# EAGLE board LoRa Node Board (EAGLE 8.6.0)
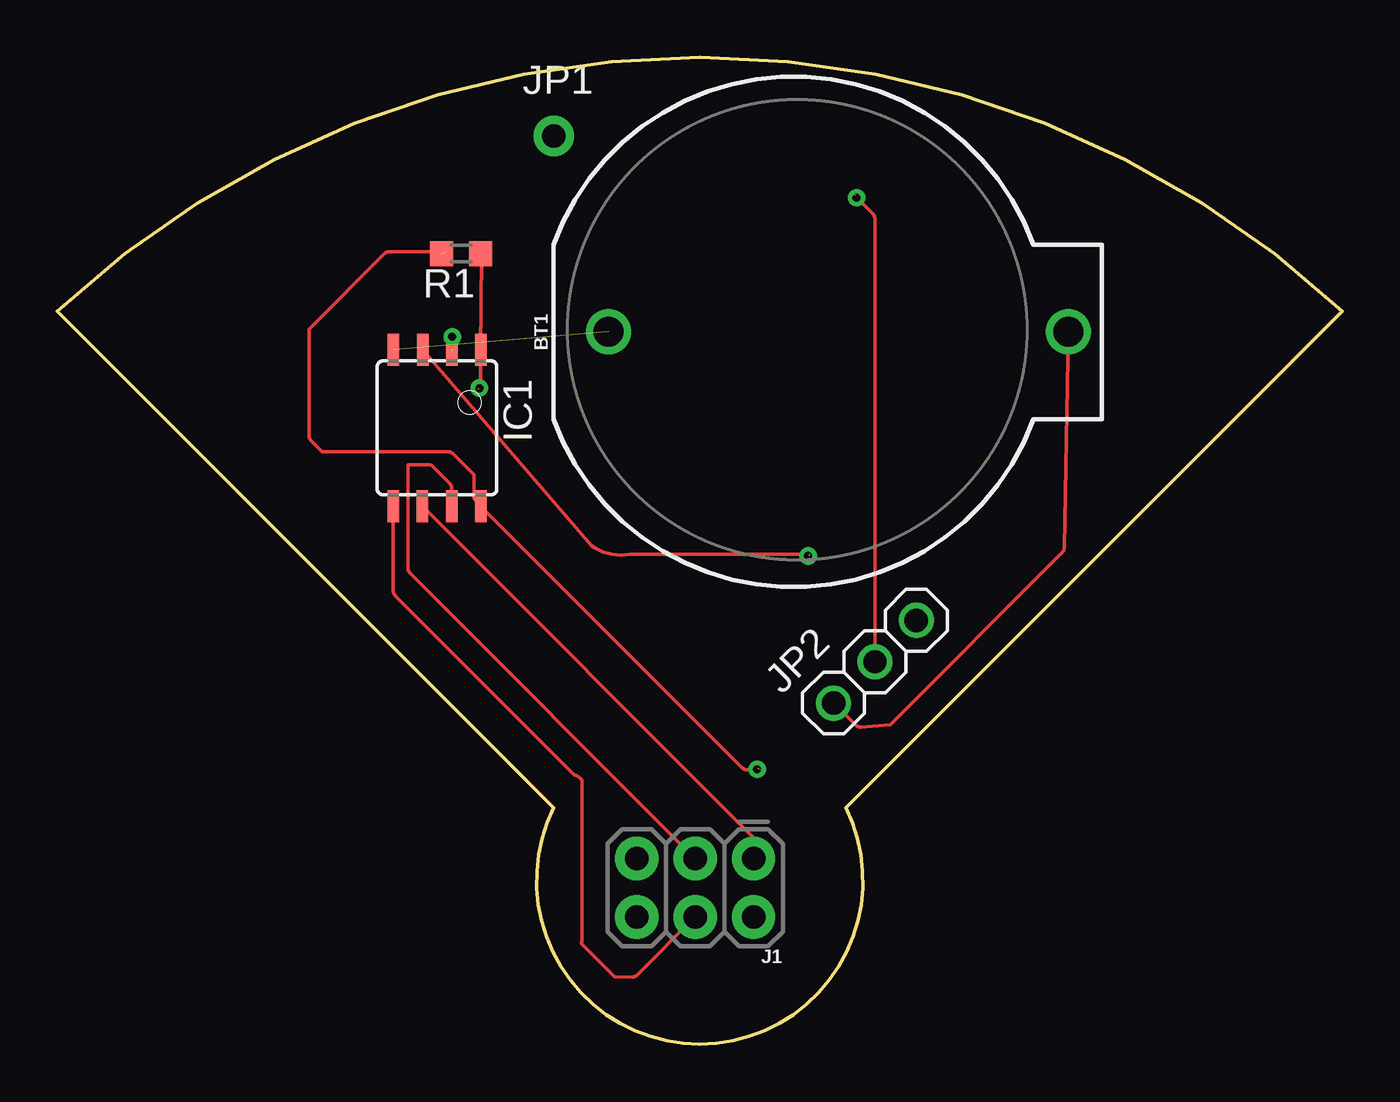
[diagram p0: board, top side]
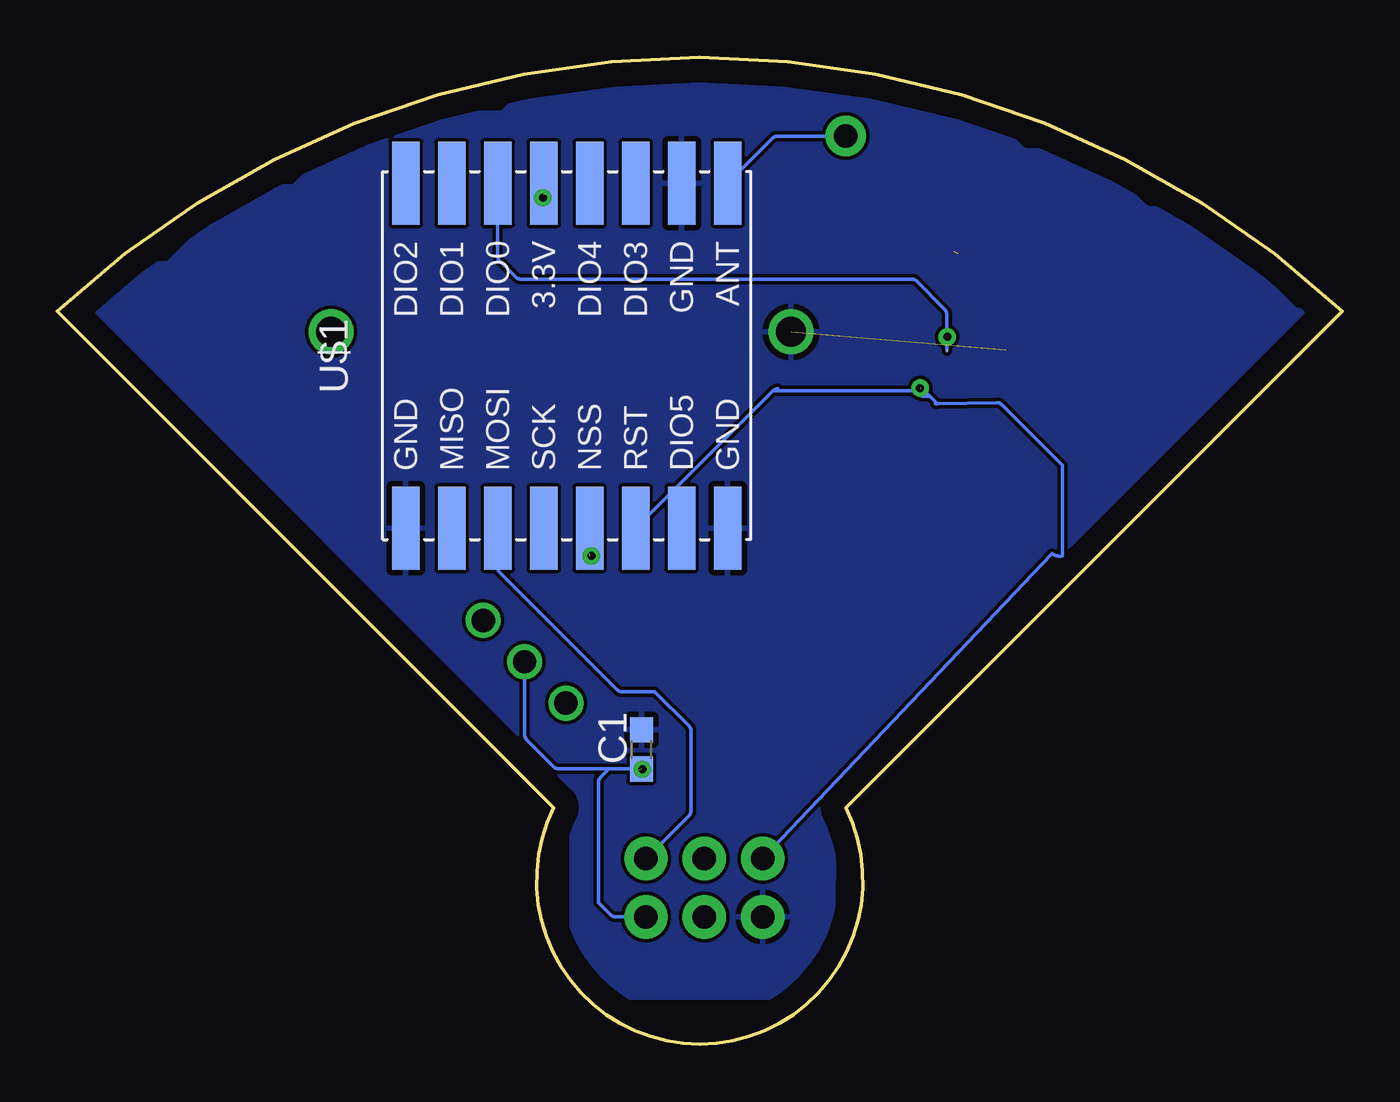
[diagram p1: board, bottom side, seen from below]

Size 55.88 x 42.9 mm. Coordinates in mm from the lower left corner, seen from the top.
Outline: 21.59,10.27 arc233 34.29,10.27 55.88,31.86 arc86 0,31.86 21.59,10.27
Copper layers (1*16): Top 0.035mm / dielectric 1.5mm / Bottom 0.035mm
Design rules "default *": minimum track width 6mil, minimum drill 0.35mm, track to track 6mil, track to pad 8mil, pad to pad 6mil, via to via 6mil, smd to smd 6mil, copper to edge 40mil, drill to drill 6mil, minimum pad ring 10mil, minimum via ring 8mil, stop-mask expansion 4mil, vias tented up to drill 0mil, thermal gap 10mil

## Footprints (pad centres in the part's own frame; a part is rotated, then mirrored left to right if it is on the bottom)
BATTCOM_20MM_PTH = drill 1.3: 1 11.85,0; 2 -8.15,0
C0603 = smd 1.1 x 1: 1 -0.85,0; 2 0.85,0
8S2 = smd 0.5 x 1.4: 1 -1.905,-3.404; 2 -0.645,-3.404; 3 0.625,-3.404; 4 1.895,-3.404; 5 1.905,3.404; 6 0.635,3.404; 7 -0.635,3.404; 8 -1.905,3.404
2X3-NS = drill 1.016 pad 1.88: 1 -2.54,-1.27; 2 -2.54,1.27; 3 0,-1.27; 4 0,1.27; 5 2.54,-1.27; 6 2.54,1.27
1X01-CLEANBIG = drill 1.016 pad 1.778: 1 0,0
1X03 = drill 1.016: 1 -2.54,0; 2 0,0; 3 2.54,0
R0603 = smd 1 x 1.1: 1 -0.85,0; 2 0.85,0
WIRELESS-LORA-RFM95W#SMD = smd 3.6 x 1.2: A1 -7.5,7; A2 -7.5,5; A3 -7.5,3; A4 -7.5,1; A5 -7.5,-1; A6 -7.5,-3; A7 -7.5,-5; A8 -7.5,-7; B1 7.5,7; B2 7.5,5; B3 7.5,3; B4 7.5,1; B5 7.5,-1; B6 7.5,-3; B7 7.5,-5; B8 7.5,-7

## Placement (x,y rotation side)
BT1  [BATTCOM_20MM_PTH]  32.12,30.97 0 top
C1  [C0603]  30.48,12.81 90 bottom
IC1  TINY13-20SU  [8S2]  16.51,26.78 180 top
J1  AVR_SPI_PROG_3X2NS  [2X3-NS]  27.74,6.8 180 top
JP1  [1X01-CLEANBIG]  21.59,39.48 0 top
JP2  [1X03]  35.56,16.62 45 top
R1  [R0603]  17.56,34.37 180 top
U$1  WIRELESS-LORA-RFM95W#SMD  [WIRELESS-LORA-RFM95W#SMD]  33.73,29.93 90 bottom

## Library data of the parts
BT1 = SparkFun-Batteries; PROD_ID: BATT-09031; SF_SKU: PRT-00783
C1 = rcl; SPICEPREFIX: C
IC1 = atmel; MPN: ATTINY13-20SU; OC_FARNELL: 9171568; OC_NEWARK: 96K6522
J1 = SparkFun-Connectors
JP1 JP2 = adafruit
R1 = rcl; SPICEPREFIX: R
U$1 = diy-modules

## Nets
ANT: JP1.1 U$1.B8
B1: U$1.B1
DIO1: U$1.B2
DIO3: U$1.B6
DIO4: U$1.B5
DIO5: U$1.A7
GND: BT1.2 C1.2 IC1.4 J1.6 U$1.A1 U$1.A8 U$1.B7
MISO: U$1.A2
N$20: BT1.1 JP2.1
PB0: IC1.5 J1.4
PB1: IC1.6 J1.1 U$1.A3
PB2: IC1.7 J1.3
PB3: IC1.2 U$1.B3
PB4: IC1.3 U$1.A5
RST: IC1.1 J1.5 R1.1 U$1.A6
SCK: U$1.A4
VCC: C1.1 IC1.8 J1.2 JP2.2 R1.2 U$1.B4

## Tracks (layer width: path | path; a pad name or v marks a point on that pad's centre or on a via)
ANT
  Bottom 0.152: U$1.B8 24.77,39.39 arc45 24.54,39.48 JP1.1
GND  (1 unrouted)
  pour Bottom: 22.1,4.27 arc45 22.19,4.05 24.16,2.07 arc45 24.39,1.98 31.67,1.98 33.55,3.86 33.55,10.1 arc-45 33.62,10.28 54.18,30.84 arc45 54.27,31.06 54.27,32.49 52.87,33.89 arc45 52.65,33.98 51.09,33.98 48.65,36.42 arc-45 48.55,36.65 48.55,36.77 48.1,37.22 arc45 47.88,37.31 45.62,37.31 43.85,39.09 arc-45 43.75,39.31 43.75,39.38 42.15,39.38 arc-45 41.92,39.47 41.1,40.29 arc-45 41.07,40.37 41.01,40.43 arc45 40.79,40.52 36.57,40.52 35.29,41.8 arc45 35.07,41.89 33.16,41.89 32.93,42.12 arc45 32.71,42.21 22.72,42.21 arc45 22.5,42.12 22.07,41.69 19.37,41.69 arc45 19.14,41.6 18.17,40.62 15.69,40.62 arc45 15.46,40.53 13.91,38.97 arc-45 13.68,38.88 10.98,38.88 8.56,36.46 arc-45 8.34,36.37 6.43,36.37 2.09,32.03 arc-45 1.87,31.94 0.86,31.94 21.99,10.81 arc-45 22.09,10.58 22.09,9.84
N$1  (via drill 0.35 pad 0.55)
  other vias: 18.35,28.53
N$2  (via drill 0.35 pad 0.55)
  other vias: 17.17,30.75
N$3  (via drill 0.35)
  other vias: 34.76,36.8
N$4  (via drill 0.35)
  other vias: 30.44,11.95
N$5  (via drill 0.35)
  other vias: 32.65,21.22
N$20
  Top 0.152: JP2.1 34.72,13.88 arc45 34.94,13.78 36.22,13.89 43.61,21.27 arc45 43.81,21.6 BT1.1
PB0
  Top 0.152: IC1.5 14.6,19.71 arc45 14.7,19.49 22.47,11.71 arc-45 22.83,11.44 22.83,4.52 arc45 22.8,4.36 24.22,2.93 25,2.91 arc45 25.22,3.01 J1.4
PB1
  Top 0.152: IC1.6 30.19,9.07 arc-45 30.28,8.84 J1.1
  Bottom 0.152: U$1.A3 36.73,20.73 arc-45 36.63,20.5 31.54,15.41 arc-45 31.32,15.32 29.9,15.32 28.41,13.83 arc45 28.32,13.61 28.32,10.16 arc45 28.41,9.94 J1.1
PB2
  Top 0.152: J1.3 15.34,20.46 arc-45 15.25,20.69 15.25,25.2 16.11,25.2 arc-45 16.33,25.11 17.05,24.39 arc-45 17.14,24.16 IC1.7
PB3  (1 unrouted)
  Bottom 0.152: U$1.B3 36.73,34.26 arc-45 36.63,34.04 35.96,33.36 arc-45 35.73,33.27 18.73,33.27 arc45 18.5,33.17 17.29,31.96 arc45 17.2,31.74 17.2,30.16
PB4  (1 unrouted)
  Top 0.152: IC1.3 23.24,21.67 arc45 24.91,21.29 32.57,21.29 arc-45 32.71,21.23
  Bottom 0.152: U$1.A5 32.73,21.32 arc-45 32.66,21.16
RST  (1 unrouted)
  Top 0.152: 18.45,34.22 IC1.1 18.41,28.76 arc-45 18.32,28.53 18.33,28.51 arc45 18.35,28.5 | 18.45,34.22 arc-45 18.51,34.25 18.62,34.36 | 18.45,34.22 18.41,34.35 arc45 R1.1
  Bottom 0.152: J1.5 12.62,21.32 arc-45 12.17,21.23 12.17,25.18 14.79,27.79 arc-45 15.01,27.89 17.6,27.84 | 17.6,27.84 17.68,27.84 | U$1.A6 24.75,28.4 | 24.75,28.4 arc45 24.53,28.5 | 17.6,27.84 17.93,28.17 | 17.93,28.17 18.29,28.53 | 18.29,28.53 18.34,28.58 arc-45 18.36,28.59 | 24.75,28.4 18.55,28.4 | 18.55,28.4 arc-45 18.32,28.5 18.29,28.53 | 17.93,28.17 18.18,28.17 arc45 18.41,28.26 18.55,28.4
VCC  (3 unrouted)
  Top 0.152: JP2.2 35.56,35.88 arc45 35.47,36.1 34.63,36.94 | 30.58,11.93 30,11.93 arc-45 29.78,12.02 IC1.8 18.22,23.57 arc-45 18.13,23.8 18.13,24.75 17.22,25.66 arc45 16.99,25.75 11.51,25.75 11.04,26.23 arc-45 10.94,26.45 10.94,31.09 14.22,34.36 arc-45 14.44,34.46 16.88,34.46
  Bottom 0.152: JP2.2 35.56,13.45 arc-45 35.47,13.23 34.3,12.06 arc-45 34.07,11.96 31.89,11.96 | 31.89,11.96 C1.1 | J1.2 31.59,5.53 arc45 31.81,5.62 32.34,6.15 32.34,11.39 arc45 32.25,11.61 31.89,11.96 | 34.63,36.71 arc45 34.73,36.93 U$1.B4 34.73,36.87 arc45 34.77,36.77 arc45 34.65,36.72 34.63,36.71 | 34.63,36.71 34.34,36.41